# EAGLE board compilacion cerebros (EAGLE 7.3.0)
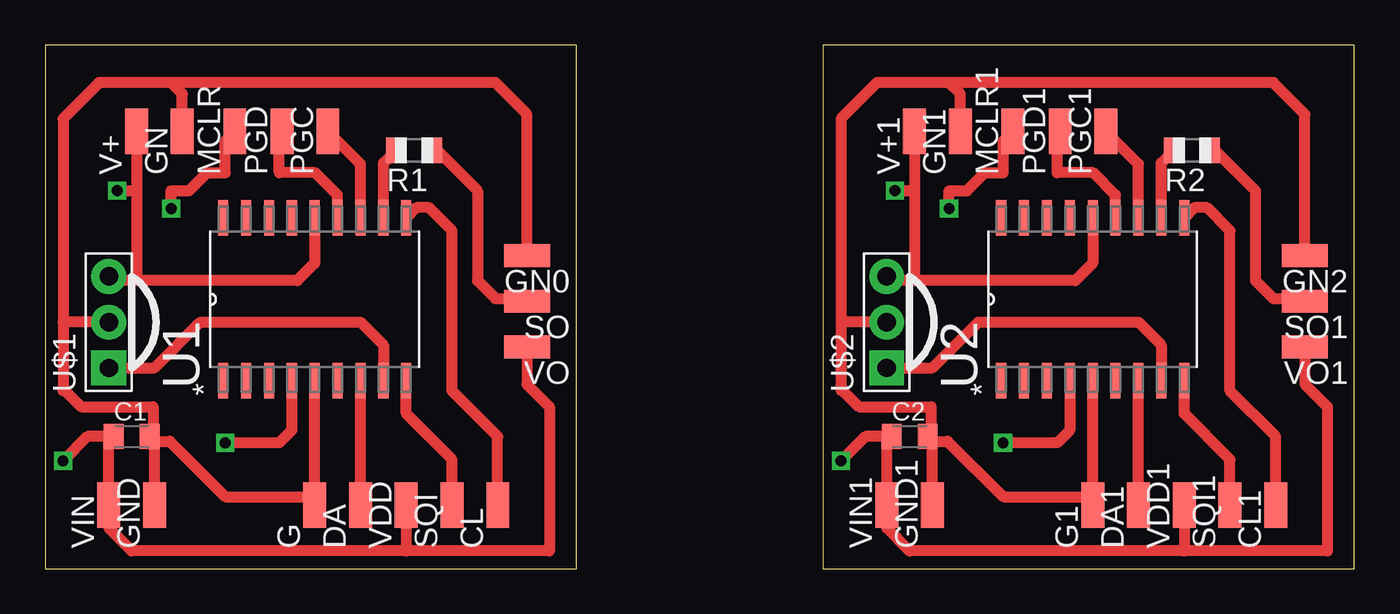
[diagram p0: board, top side]
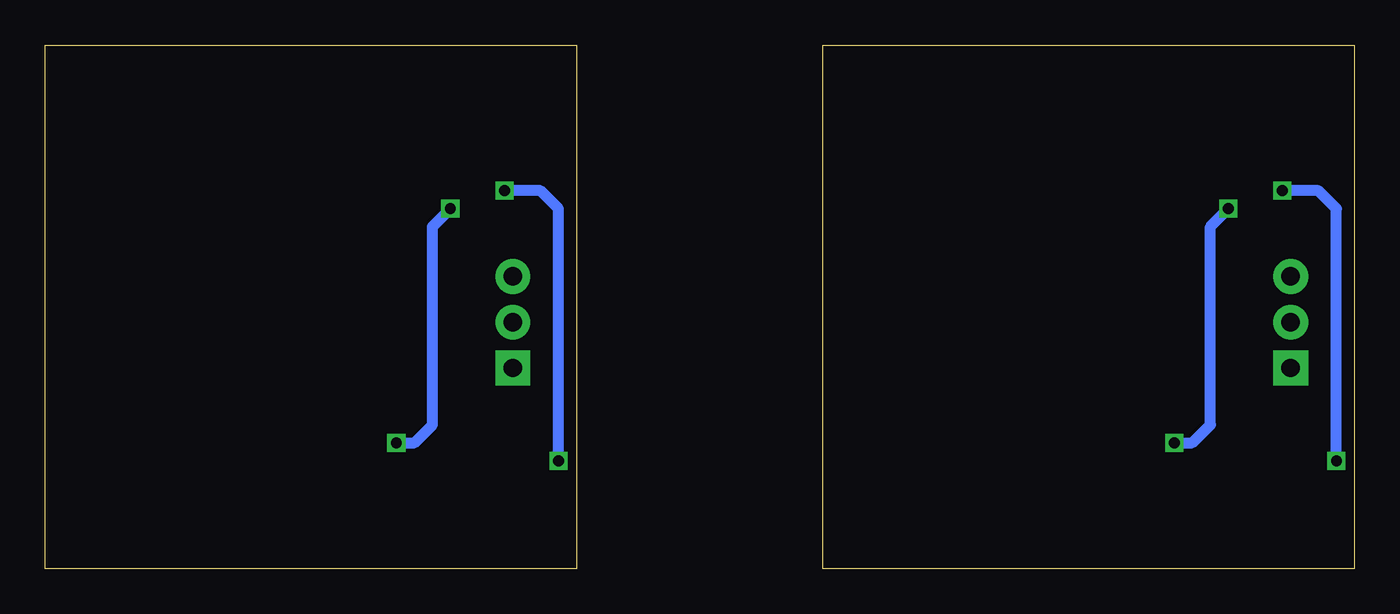
[diagram p1: board, bottom side, seen from below]

Size 72.68 x 29.09 mm. Coordinates in mm from the lower left corner, seen from the top.
Outline: 0,0 29.5,0 29.5,29.09 0,29.09 0,0
Outline: 43.18,0 72.68,0 72.68,29.09 43.18,29.09 43.18,0
Copper layers (1*16): Top 0.035mm / dielectric 1.5mm / Bottom 0.035mm
Design rules "default": minimum track width 10mil, minimum drill 24mil, track to track 8mil, track to pad 8mil, pad to pad 8mil, via to via 8mil, smd to smd 8mil, copper to edge 40mil, drill to drill 8mil, minimum pad ring 10mil, minimum via ring 8mil, stop-mask expansion 4mil, vias tented up to drill 0mil, thermal gap 10mil

## Footprints (pad centres in the part's own frame; a part is rotated, then mirrored left to right if it is on the bottom)
C0805K = smd 1.1 x 1.4: 1 -1,0; 2 1,0
SMD1,27-2,54 = smd 1.27 x 2.54: 1 0,0
R0805 = smd 1.1 x 1.4: 1 -1,0; 2 1,0
SOIC127P1030X265-18N = smd 1.981 x 0.559: 1 -4.521,5.08; 2 -4.521,3.81; 3 -4.521,2.54; 4 -4.521,1.27; 5 -4.521,0; 6 -4.521,-1.27; 7 -4.521,-2.54; 8 -4.521,-3.81; 9 -4.521,-5.08; 10 4.521,-5.08; 11 4.521,-3.81; 12 4.521,-2.54; 13 4.521,-1.27; 14 4.521,0; 15 4.521,1.27; 16 4.521,2.54; 17 4.521,3.81; 18 4.521,5.08
PNA460XM = drill 1.016 pad 1.93 square: 1 -2.54,0 | drill 1.016 pad 1.93: 2 0,0; 3 2.54,0

## Placement (x,y rotation side)
C1  4.7uF  [C0805K]  4.81,7.35 0 top
C2  4.7uF  [C0805K]  47.99,7.35 0 top
CL  [SMD1,27-2,54]  25.13,3.54 0 top
CL1  [SMD1,27-2,54]  68.31,3.54 0 top
DA  [SMD1,27-2,54]  17.51,3.54 0 top
DA1  [SMD1,27-2,54]  60.69,3.54 0 top
G  [SMD1,27-2,54]  14.97,3.54 0 top
G1  [SMD1,27-2,54]  58.15,3.54 0 top
GN  [SMD1,27-2,54]  7.62,24.29 0 top
GN0  [SMD1,27-2,54]  26.75,17.4 90 top
GN1  [SMD1,27-2,54]  50.8,24.29 0 top
GN2  [SMD1,27-2,54]  69.93,17.4 90 top
GND  [SMD1,27-2,54]  6.08,3.54 0 top
GND1  [SMD1,27-2,54]  49.26,3.54 0 top
MCLR  [SMD1,27-2,54]  10.54,24.29 0 top
MCLR1  [SMD1,27-2,54]  53.72,24.29 0 top
PGC  [SMD1,27-2,54]  15.7,24.29 0 top
PGC1  [SMD1,27-2,54]  58.88,24.29 0 top
PGD  [SMD1,27-2,54]  13.16,24.29 0 top
PGD1  [SMD1,27-2,54]  56.34,24.29 0 top
R1  330  [R0805]  20.48,23.24 180 top
R2  330  [R0805]  63.66,23.24 180 top
SO  [SMD1,27-2,54]  26.75,14.86 90 top
SO1  [SMD1,27-2,54]  69.93,14.86 90 top
SQI  [SMD1,27-2,54]  22.59,3.54 0 top
SQI1  [SMD1,27-2,54]  65.77,3.54 0 top
U1  PIC16F1847-I/SO  [SOIC127P1030X265-18N]  14.97,14.97 90 top
U2  PIC16F1847-I/SO  [SOIC127P1030X265-18N]  58.15,14.97 90 top
U$1  PNA460XM  [PNA460XM]  3.54,13.7 90 top
U$2  PNA460XM  [PNA460XM]  46.72,13.7 90 top
V+  [SMD1,27-2,54]  5.08,24.29 0 top
V+1  [SMD1,27-2,54]  48.26,24.29 0 top
VDD  [SMD1,27-2,54]  20.05,3.54 0 top
VDD1  [SMD1,27-2,54]  63.23,3.54 0 top
VIN  [SMD1,27-2,54]  3.54,3.54 0 top
VIN1  [SMD1,27-2,54]  46.72,3.54 0 top
VO  [SMD1,27-2,54]  26.75,12.32 90 top
VO1  [SMD1,27-2,54]  69.93,12.32 90 top

## Library data of the parts
C1 C2 R1 R2 U$1 U$2 = adafruit
CL CL1 DA DA1 G G1 GN GN0 GN1 GN2 GND GND1 MCLR MCLR1 PGC PGC1 PGD PGD1 SO SO1 SQI SQI1 V+ V+1 VDD VDD1 VIN VIN1 VO VO1 = wirepad
U1 U2 = PIC 16F1847; MPN: PIC16F1847-I/SO; OC_FARNELL: 1971870; OC_NEWARK: 23T3107; PACKAGE: SOIC-18; SUPPLIER: Microchip

## Nets
5V: C1.1 U1.14 U$1.3 V+.1 VDD.1 VIN.1 VO.1
5V1: C2.1 U2.14 U$2.3 V+1.1 VDD1.1 VIN1.1 VO1.1
GND: C1.2 G.1 GN0.1 GN.1 GND.1 U1.5 U$1.2
GND1: C2.2 G1.1 GN1.1 GN2.1 GND1.1 U2.5 U$2.2
IR1: U1.8 U$1.1
IR2: U2.8 U$2.1
L1: U1.6
L2: U1.3
L3: U1.2
L4: U1.1
L5: R1.2 U1.11
L6: PGC.1 U1.12
L7: PGD.1 U1.13
L8: U1.15
L9: U1.16
L10: U1.17
L11: U1.18
L12: U2.6
L13: U2.3
L14: U2.2
L15: U2.1
L16: R2.2 U2.11
L17: PGC1.1 U2.12
L18: PGD1.1 U2.13
L19: U2.15
L20: U2.16
L21: U2.17
L22: U2.18
MCLR: MCLR.1 U1.4
MCLR1: MCLR1.1 U2.4
N$1: R1.1 SO.1
N$2: R2.1 SO1.1
SCL: CL.1 U1.10
SCL1: CL1.1 U2.10
SDA: DA.1 U1.7
SDA1: DA1.1 U2.7
SQ: SQI.1 U1.9
SQ1: SQI1.1 U2.9

## Tracks (layer width: path | path; a pad name or v marks a point on that pad's centre or on a via)
5V  (via drill 0.6)
  Top 0.61: VDD.1 20.05,1 | 20.05,1 4.81,1 3.54,2.27 VIN.1 3.54,7.08 C1.1 2.35,7.35 v1,6 | U1.14 14.97,16.97 14,16 5,16 | 5,16 3.78,16 U$1.3 | V+.1 5.08,21 | 5.08,21 5.08,16.08 5,16 | VO.1 26.75,10.25 28,9 28,1 20.05,1 | v4,21 5.08,21
  Bottom 0.61: v1,6 1,20 2,21 v4,21
5V1  (via drill 0.6)
  Top 0.61: VDD1.1 63.23,1 | 63.23,1 47.99,1 46.72,2.27 VIN1.1 46.72,7.08 C2.1 45.53,7.35 v44.18,6 | U2.14 58.15,16.97 57.18,16 48.18,16 | 48.18,16 46.96,16 U$2.3 | V+1.1 48.26,21 | 48.26,21 48.26,16.08 48.18,16 | VO1.1 69.93,10.25 71.18,9 71.18,1 63.23,1 | v47.18,21 48.26,21
  Bottom 0.61: v44.18,6 44.18,20 45.18,21 v47.18,21
GND
  Top 0.61: GND.1 6.08,7.08 | 6.08,7.08 C1.2 6,7.54 6,9 2,9 1.11,9.89 1,9.89 1,13.7 | U1.5 G.1 15,3.57 15,4 10,4 6.92,7.08 6.08,7.08 | U$1.2 1,13.7 | GN.1 7.62,26.38 7,27 | 7,27 3,27 1,25 1,13.7 | GN0.1 26.75,25.25 25,27 7,27
GND1
  Top 0.61: GND1.1 49.26,7.08 | 49.26,7.08 C2.2 49.18,7.54 49.18,9 45.18,9 44.29,9.89 44.18,9.89 44.18,13.7 | U2.5 G1.1 58.18,3.57 58.18,4 53.18,4 50.1,7.08 49.26,7.08 | U$2.2 44.18,13.7 | GN1.1 50.8,26.38 50.18,27 | 50.18,27 46.18,27 44.18,25 44.18,13.7 | GN2.1 69.93,25.25 68.18,27 50.18,27
IR1
  Top 0.61: U$1.1 6.08,11.16 8.62,13.7 17.51,13.7 18.78,12.43 U1.8
IR2
  Top 0.61: U$2.1 49.26,11.16 51.8,13.7 60.69,13.7 61.96,12.43 U2.8
L5
  Top 0.61: U1.11 18.78,22.54 R1.2
L6
  Top 0.61: U1.12 17.51,22.48 PGC.1
L7
  Top 0.61: U1.13 16.24,20.76 15,22 13,22 13,24.13 PGD.1
L16
  Top 0.61: U2.11 61.96,22.54 R2.2
L17
  Top 0.61: U2.12 60.69,22.48 PGC1.1
L18
  Top 0.61: U2.13 59.42,20.76 58.18,22 56.18,22 56.18,24.13 PGD1.1
MCLR  (via drill 0.6)
  Top 0.61: U1.4 13.7,7.7 13,7 v10,7 | v7,20 7,21 8,21 9,22 10,22 10,23.75 MCLR.1
  Bottom 0.61: v10,7 9,7 8,8 8,19 v7,20
MCLR1  (via drill 0.6)
  Top 0.61: U2.4 56.88,7.7 56.18,7 v53.18,7 | v50.18,20 50.18,21 51.18,21 52.18,22 53.18,22 53.18,23.75 MCLR1.1
  Bottom 0.61: v53.18,7 52.18,7 51.18,8 51.18,19 v50.18,20
N$1
  Top 0.61: R1.1 21.76,23.24 24,21 24,16 25,15 26.61,15 SO.1
N$2
  Top 0.61: R2.1 64.94,23.24 67.18,21 67.18,16 68.18,15 69.79,15 SO1.1
SCL
  Top 0.61: CL.1 25.13,7.35 22.59,9.89 22.59,18.78 21.32,20.05 20.61,20.05 U1.10
SCL1
  Top 0.61: CL1.1 68.31,7.35 65.77,9.89 65.77,18.78 64.5,20.05 63.79,20.05 U2.10
SDA
  Top 0.61: DA.1 U1.7
SDA1
  Top 0.61: DA1.1 U2.7
SQ
  Top 0.61: SQI.1 22.59,6.08 20.05,8.62 U1.9
SQ1
  Top 0.61: SQI1.1 65.77,6.08 63.23,8.62 U2.9